# Altium PCB pcbChaves.PcbDoc
Units mm, origin at the board's own origin, x right, y up, seen from the top; angles counter-clockwise.
Board outline 86.57 x 75.6 mm, 2 copper layers (Top Layer, Bottom Layer); 43 components, 27 nets, 103 pads, 22 vias.
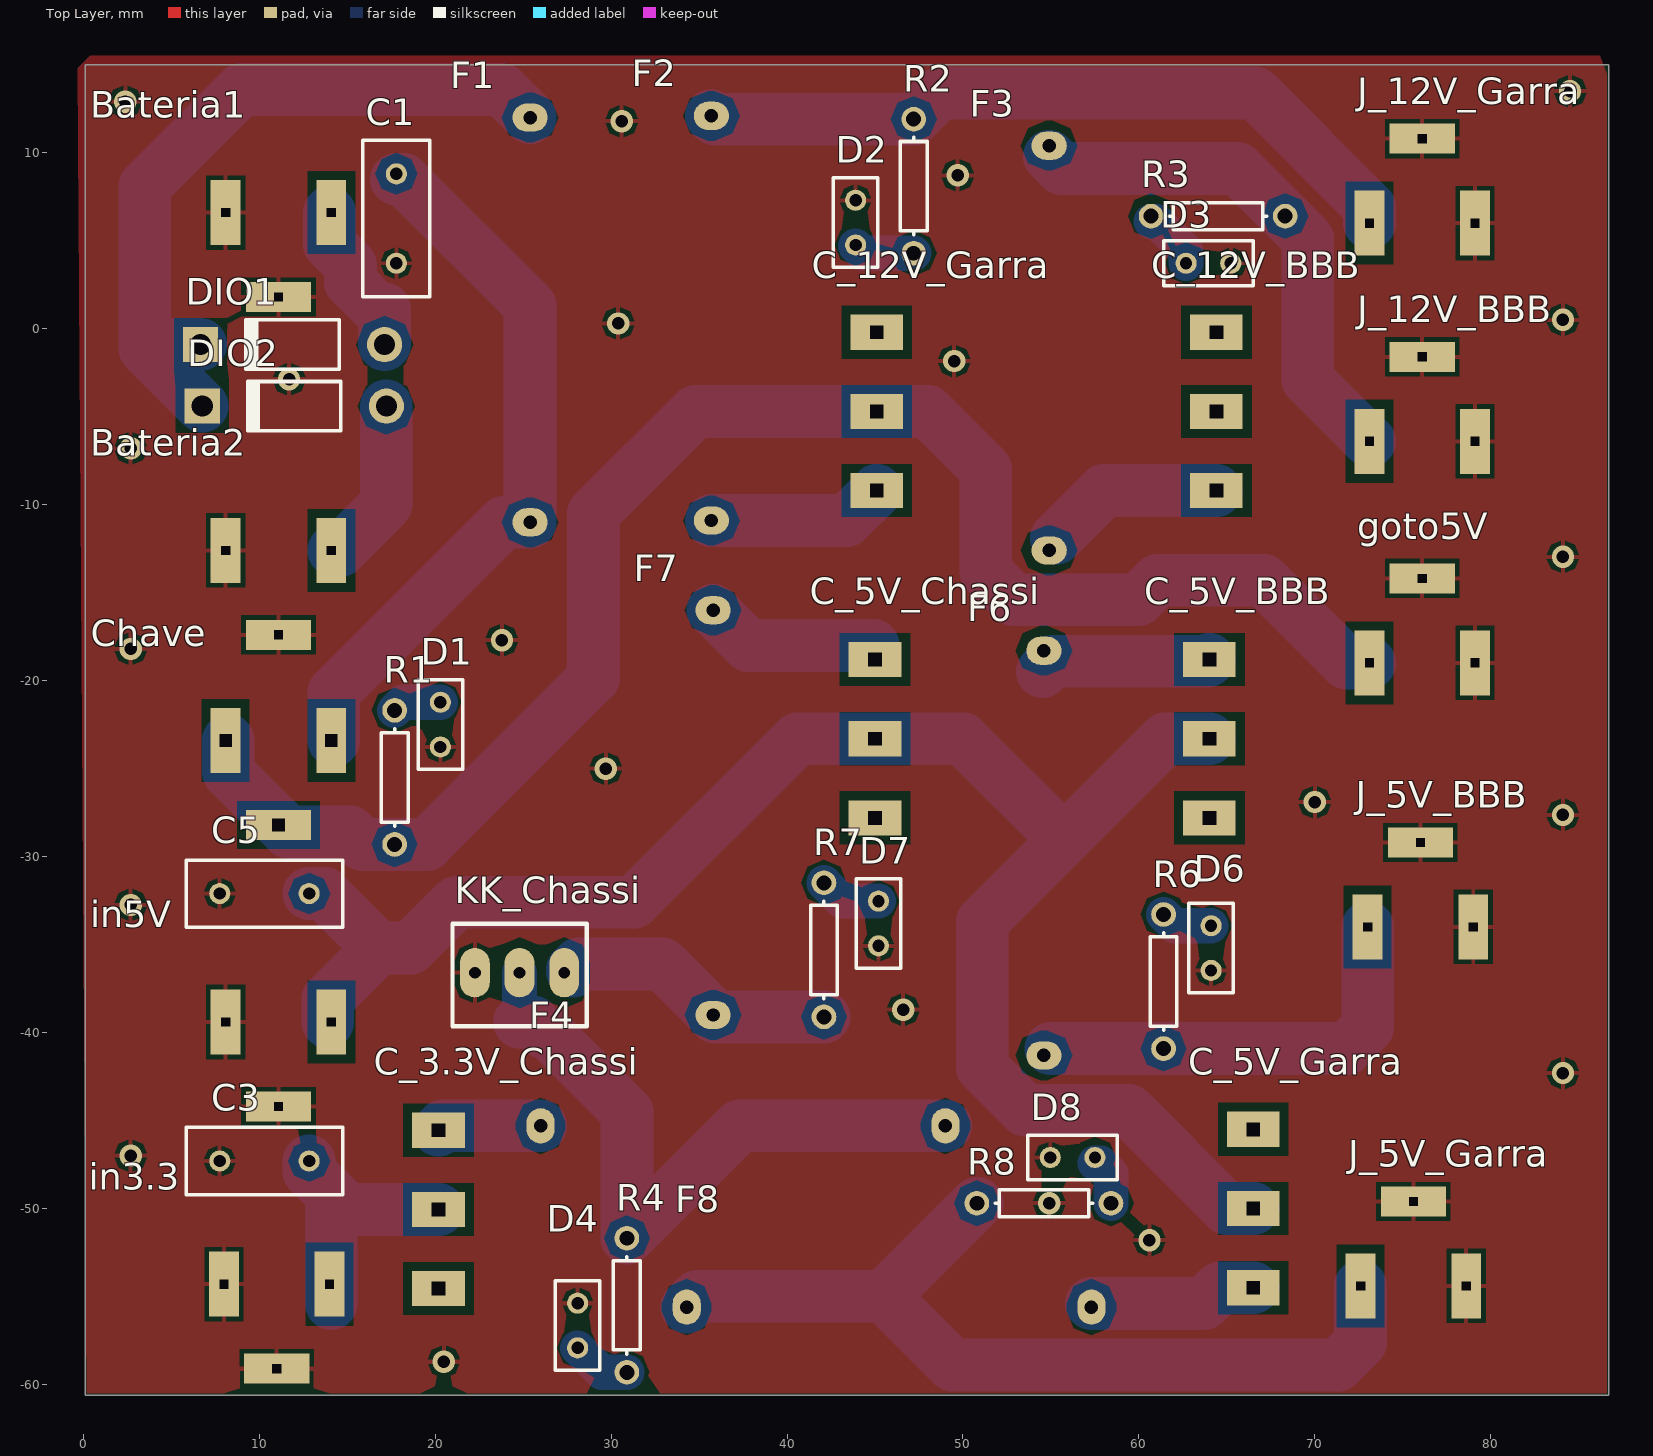
[diagram p0: Top Layer view]
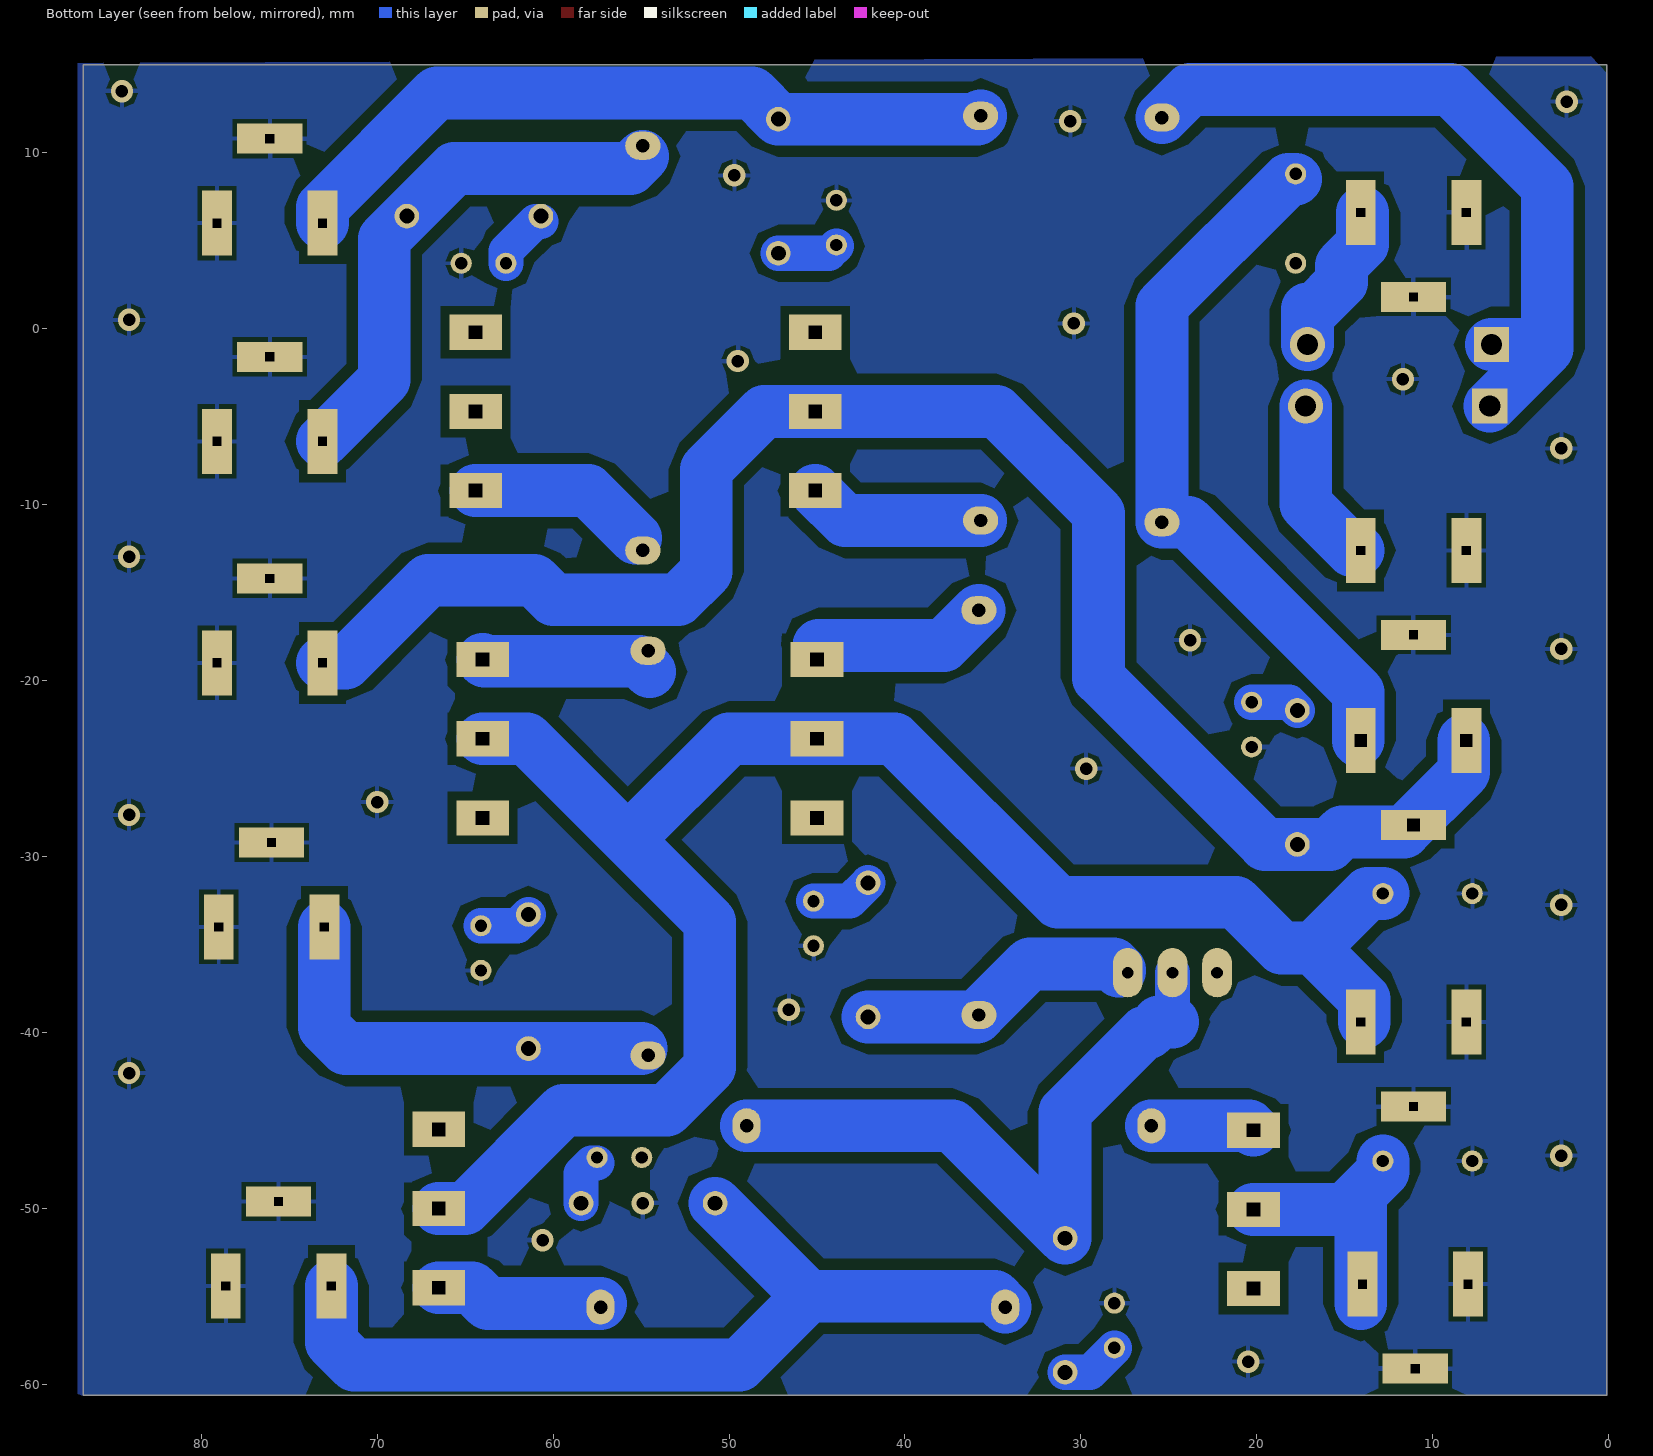
[diagram p1: Bottom Layer view, seen from below]
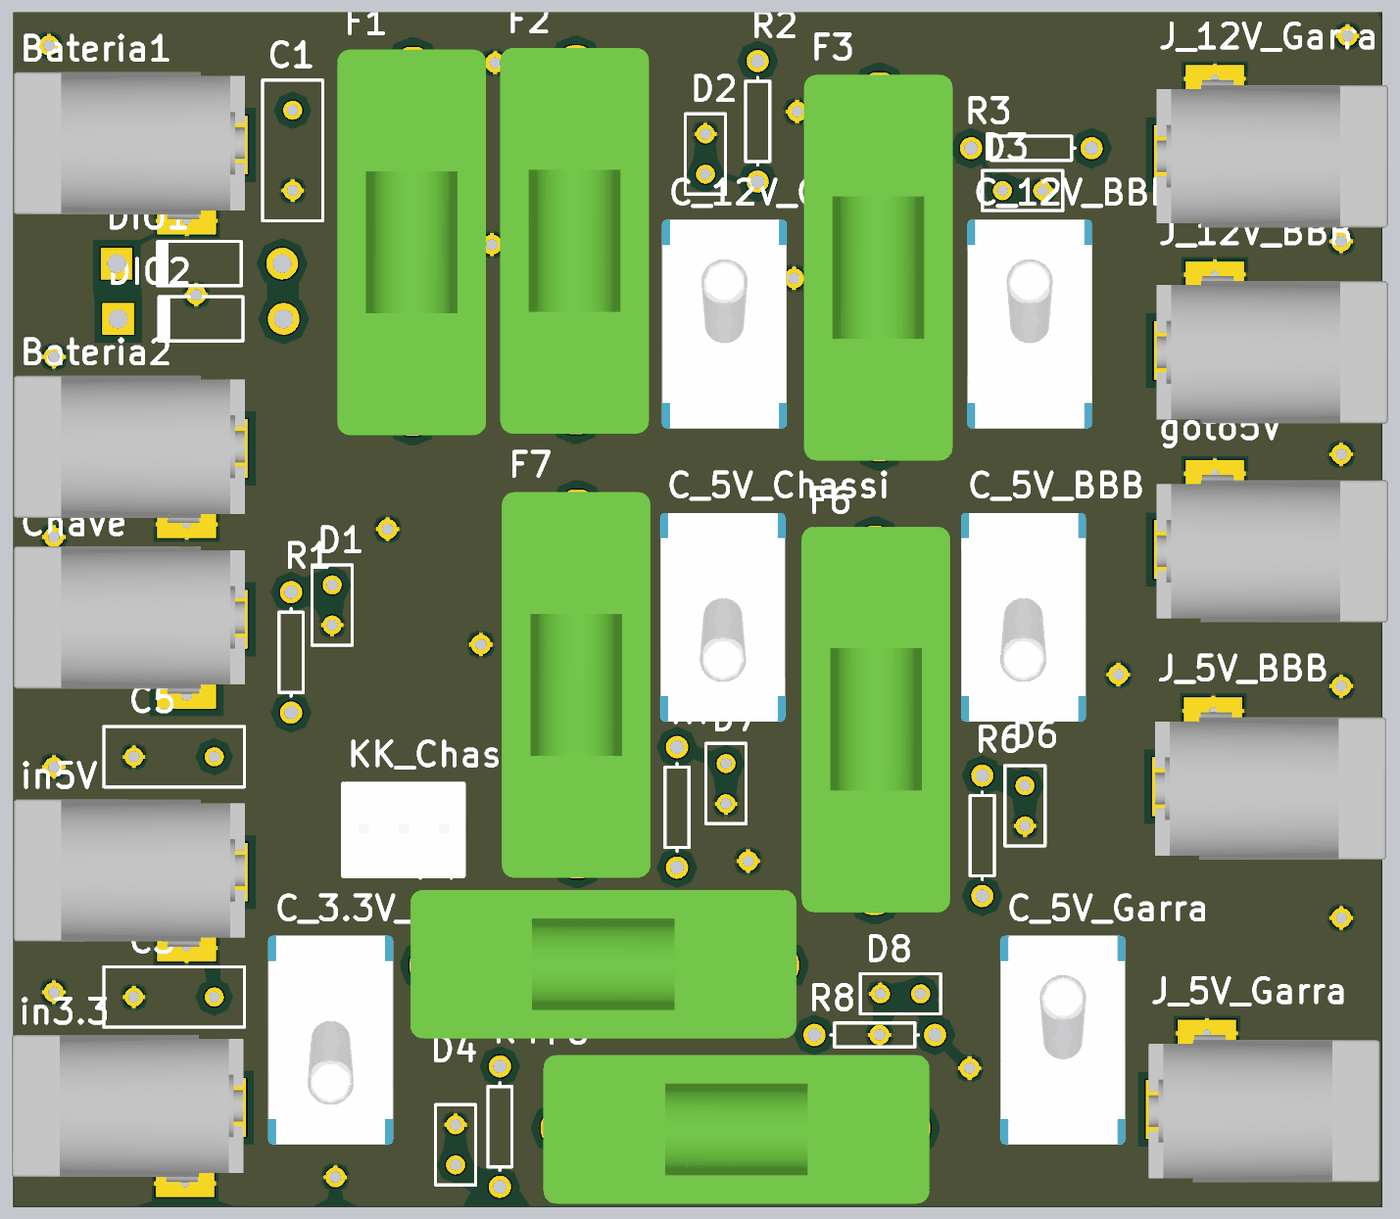
[diagram p2: 3D render of the assembled board from above, using the file's embedded part models]

## Layer stack, top to bottom
Top Solder: solder mask 0.0102, Solder Resist, Dk 3.5
Top Layer: signal copper 0.0356
Dielectric 1: dielectric 0.32, FR-4, Dk 4.8
Bottom Layer: signal copper 0.0356
Bottom Solder: solder mask 0.0102, Solder Resist, Dk 3.5

## Board outline
0.127,-60.6 86.7,-60.6 86.7,15 0.127,15

## Design rules (kind name [scope] priority, off if disabled: settings)
Clearance [All] p1: gap=0.5 ignorepadtopadclearanceinfootprint=FALSE
DiffPairsRouting [All] p1: maxlimit=1 minlimit=0.5 mostfreqgap=0.5 toplayer_minwidth=0.5 toplayer_maxwidth=4 toplayer_prefwidth=4 bottomlayer_minwidth=0.5 bottomlayer_maxwidth=4 bottomlayer_prefwidth=4 maxuncoupledlength=12.7
PlaneClearance [All] p1: clearance=0.7
PlaneConnect [All] p1: planeconnectstyle=Relief reliefexpansion=0.508 reliefentries=4 reliefconductorwidth=1 reliefairgap=0.254
PolygonConnect [All] p1: connectstyle=Relief reliefconductorwidth=0.254 reliefentries=4 polygonreliefangle="90 Angle" airgapwidth=0.254
RoutingVias [All] p1: holewidth=0.711 width=1.27 viastyle="Through Hole" minholewidth=0.711 minwidth=1.27 maxholewidth=0.711 maxwidth=1.27
SolderMaskExpansion [All] p1: expansion=0.102
Width [All] p1: maxlimit=4 minlimit=0.254 preferedwidth=3
27 further rules are at their usual default settings.

## Components (designator, comment, footprint, x,y, rotation, side; value= is the part's Value field where it differs from the comment)
Bateria1 "Jack" "JACK J4"#1 8.1,6.6 r0 top
Bateria2 "Jack" "JACK J4"#1 8.1,-12.6 r0 top
C1 "Cap2" RAD-0.2 17.8,6.26 r270 top value=100pF
C3 "Cap2" RAD-0.2 10.3,-47.3 r180 top value=100pF
C5 "Cap2" RAD-0.2 10.3,-32.1 r180 top value=100pF
C_3.3V_Chassi "Chave" Chave 20.2,-50.051 r90 top
C_5V_BBB "Chave" Chave 64,-23.3 r90 top
C_5V_Chassi "Chave" Chave 45,-23.3 r90 top
C_5V_Garra "Chave" Chave 66.5,-50 r270 top
C_12V_BBB "Chave" Chave 64.4,-4.7 r270 top
C_12V_Garra "Chave" Chave 45.1,-4.7 r270 top
Chave "Jack" "JACK J4"#2 8.1,-23.4 r0 top
D1 "LED2" RAD-0.1 20.3,-22.5 r270 top
D2 "LED2" RAD-0.1 43.9,6.03 r90 top
D3 "LED2" RAD-0.1 63.95,3.72 r0 top
D4 "LED2" RAD-0.1 28.1,-56.65 r90 top
D6 "LED2" RAD-0.1 64.1,-35.2 r270 top
D7 "LED2" RAD-0.1 45.2,-33.8 r270 top
D8 "LED2" RAD-0.1 56.23,-47.1 r180 top
DIO1 "Diode 1N4007" DO-41 11.9,-0.9 r180 top
DIO2 "Diode 1N4007" DO-41 12,-4.4 r180 top
F1 "Fuse 2" Fusivel 25.4,12 r270 top
F2 "Fuse 2" Fusivel 35.7,12.1 r270 top
F3 "Fuse 2" Fusivel 54.9,10.4 r270 top
F4 "Fuse 2" Fusivel 49,-45.3 r180 top
F6 "Fuse 2" Fusivel 54.6,-41.3 r90 top
F7 "Fuse 2" Fusivel 35.8,-16 r270 top
F8 "Fuse 2" Fusivel 34.3,-55.6 r0 top
goto5V "Jack" "JACK J4"#1 79.1,-18.99 r180 top
in3.3 "Jack" "JACK J4"#1 8,-54.3 r0 top
in5V "Jack" "JACK J4"#1 8.1,-39.4 r0 top
J_5V_BBB "Jack" "JACK J4"#1 79,-34 r180 top
J_5V_Garra "Jack" "JACK J4"#1 78.6,-54.4 r180 top
J_12V_BBB "Jack" "JACK J4"#1 79.1,-6.4 r180 top
J_12V_Garra "Jack" "JACK J4"#1 79.1,6 r180 top
KK_Chassi "KK3" 3-vias 24.8,-36.6 r270 top
R1 "Res1" AXIAL-0.3 17.7,-25.5 r270 top value=1K
R2 "Res1" AXIAL-0.3 47.2,8.1 r90 top value=1K
R3 "Res1" AXIAL-0.3 64.5,6.4 r0 top value=1K
R4 "Res1" AXIAL-0.3 30.9,-55.5 r90 top value=1K
R6 "Res1" AXIAL-0.3 61.4,-37.1 r270 top value=1K
R7 "Res1" AXIAL-0.3 42.1,-35.3 r270 top value=1K
R8 "Res1" AXIAL-0.3 54.6,-49.7 r180 top value=1K

## Footprints (in the part's own frame and the unit in brackets; to place one, negate y for a bottom-side part, rotate by r counter-clockwise, add the part's x,y. Pads: shape width x height; smd on the part's side, far side on the other; paste and mask are expansions set on the pad)
3-vias [mm]
  oval 2.8x1.7 hole 0.67 unplated: 1(0,2.54) 2(0,0) 3(0,-2.54)
  silkscreen extent -2.79,-3.81 3.05,3.81, body extent -2.84,-3.78 3,3.84, height 11.7
AXIAL-0.3 [mm] "Axial Device, Thru-Hole; 2 Leads; 0.3 in Pin Spacing"
  round 1.4 hole 0.85: 1(-3.81,0) 2(3.81,0)
  silkscreen extent -2.77,-0.76 2.77,0.76
Chave [mm]
  rect 2x3 hole 0.76 square: 1(0,0) 2(-4.5,0) 3(4.5,0)
  body extent -6.57,-3.95 6.63,3.95, height 28.86
DO-41 [mm] "Diode, Axial; Body 5.2 x 2.7 mm (LxDia. max), Lead Dia. 0.86 mm (max)"
  round 2 hole 1.2: 1(-5.23,0)
  rect 2x2 hole 1.2: 2(5.23,0)
  silkscreen extent -2.65,-1.4 2.75,1.4
Fusivel [mm]
  oval 1.6x2 hole 0.762: 1(0,0) 2(23,0)
  body extent -0.64,-4.78 23.76,4.62, height 13.41
"JACK J4"#1 [mm]
  rect 1.7x3.7 hole 0.5 square: 1(6,0) 2(0,0)
  rect 3.7x1.7 hole 0.5 square: 3(3,-4.8)
  body extent -7.94,-4.71 6.68,4.61, height 11
"JACK J4"#2 [mm]
  rect 1.7x3.7 hole 0.7 square: 1(6,0) 2(0,0)
  rect 3.7x1.7 hole 0.7 square: 3(3,-4.8)
  body extent -7.94,-4.71 6.68,4.61, height 11
RAD-0.1 [mm] "Radial Cap, Thru-Hole; 2 Leads; 0.1 in Pin Spacing"
  round 1.2 hole 0.7: 1(-1.27,0) 2(1.27,0)
  silkscreen extent -2.54,-1.27 2.54,1.27
RAD-0.2 [mm] "Radial Cap, Thru-Hole; 2 Leads; 0.2 in Pin Spacing"
  round 1.2 hole 0.7: 1(-2.54,0) 2(2.54,0)
  silkscreen extent -4.44,-1.91 4.44,1.91

## Part data
C1 C3 C5: "Capacitor", PackageDescription="Capacitor; 2 Leads", PackageReference=CAPR5-4X5, Published=23-Sep-2002, Publisher="Altium Limited"
D1 D2 D3 D4 D6 D7 D8: "Typical RED, GREEN, YELLOW, AMBER GaAs LED", LatestRevisionDate=17-Jul-2002, LatestRevisionNote="Re-released for DXP Platform.", PackageDescription="SM LED; 2 Flat Leads", PackageReference=3.2X1.6X1.1, PackageVersion=Feb-2002, Published=8-Jun-2000, Publisher="Altium Limited"
DIO1 DIO2: "1 Amp General Purpose Rectifier", Code_JEDEC=DO-204-AL, ComponentLink1Description="Manufacturer Link", ComponentLink1URL=http://www.fairchildsemi.com/, ComponentLink2Description=Datasheet, ComponentLink2URL=http://www.fairchildsemi.com/ds/1N%2F1N4001.pdf, DatasheetVersion=1998, LatestRevisionDate=17-Jul-2002, LatestRevisionNote="Re-released for DXP Platform.", PackageDescription="Diode, Axial; Body 5.2 x 2.7 mm (LxDia. max), Lead Dia. 0.86 mm (max)", PackageReference=DO-41, PackageVersion=Aug-1999, Published=8-Jun-2000, Publisher="Altium Limited"
F1 F2 F3 F4 F6 F7 F8: "Fuse", LatestRevisionDate=17-Jul-2002, LatestRevisionNote="Re-released for DXP Platform.", PackageDescription="Thru-Hole; 2 Leads", PackageReference=PIN-W2/E2.8, Published=8-Jun-2000, Publisher="Altium Limited"
KK_Chassi: library part KK3Vias
R1 R2 R3 R4 R6 R7 R8: "Resistor", LatestRevisionDate=17-Jul-2002, LatestRevisionNote="Re-released for DXP Platform.", PackageDescription="Axial Device, Thru-Hole; 2 Leads; 0.3 in Pin Spacing", PackageReference=AXIAL-0.3, Published=8-Jun-2000, Publisher="Altium Limited"

## Via types
v1: diameter 1.27, hole 0.711, Top Layer to Bottom Layer, 22 vias

## Nets (pads, with @x,y where several pads share a name; then routed paths per layer and width w, separated by ;. In a path a pad name is that pad's centre, name@x,y a point inside that pad or via, vN(x,y) a via of type N, cw(c..) or ccw(c..) an arc to the next point about the centre after c; other vN are vias at no path point)
3.3V: C3.1 C_3.3V_Chassi.1 in3.3.1 | length 15.1
  Bottom Layer w3: C3.1 12.84,-47.9 14.1,-49.16 ; in3.3.1@14.1,-55.4 14.1,-49.16 ; C_3.3V_Chassi.1 14.991,-50.051 14.1,-49.16
5V: C5.1 C_5V_BBB.1 C_5V_Chassi.1 C_5V_Garra.1 in5V.1 | length 101.1
  Bottom Layer w3: C5.1 13.7,-32.1 16.8,-35.2 ; in5V.1@13.9,-39.4 13.9,-38.1 16.8,-35.2 ; C_5V_BBB.1 61.5,-23.3 55.75,-29.05 ; C_5V_Garra.1 65,-50 59.41,-44.41 53.54,-44.41 51.1,-41.97 51.1,-33.7 55.75,-29.05 ; 16.8,-35.2 18.6,-35.2 21.2,-32.6 31.3,-32.6 40.6,-23.3 C_5V_Chassi.1 50,-23.3 55.75,-29.05
12V: C_12V_Garra.1 Chave.2 Chave.3 goto5V.1 R1.2 | length 94.3
  Bottom Layer w3: Chave.2@8.24,-23.4 8.24,-25.2 11.64,-28.6 15.15,-28.6 15.86,-29.31 R1.2 19.54,-29.31 29,-19.85 29,-10.5 34.8,-4.7 C_12V_Garra.1 48,-4.7 51.3,-8 51.3,-13.8 52.9,-15.4 59.972,-15.4 61.082,-14.29 67.09,-14.29 71.79,-18.99 goto5V.1
GND: Bateria1.2 Bateria1.3 Bateria2.2 Bateria2.3 C1.2 C3.2 C5.2 D1.2 D2.2 D3.2 D4.2 D6.2 D7.2 D8.2 goto5V.2 goto5V.3 in3.3.2 in3.3.3 in5V.2 in5V.3 J_5V_BBB.2 J_5V_BBB.3 J_5V_Garra.2 J_5V_Garra.3 J_12V_BBB.2 J_12V_BBB.3 J_12V_Garra.2 J_12V_Garra.3 KK_Chassi.3
  other v1: 20.5,-58.7 60.6,-51.8 54.9,-49.7 2.7,-47 84.1,-42.3 46.6,-38.7 2.7,-32.75 84.1,-27.633 70,-26.9 29.7,-25 2.7,-18.2 23.8,-17.7 84.1,-12.967 2.7,-6.8 11.7,-2.869 49.5,-1.835 30.4,0.3 84.1,0.5 49.7,8.719 30.6,11.8 2.4,12.9 84.5,13.5
NetBateria1_1: Bateria1.1 DIO1.1 | length 9
  Bottom Layer w3: Bateria1.1@14,6.6 14,4.8 15.2,3.6 15.2,2.643 16.723,1.12 17.13,1.12 DIO1.1
NetBateria2_1: Bateria2.1 DIO2.1 | length 9.6
  Bottom Layer w3: Bateria2.1@14.24,-12.6 14.6,-12.6 17.23,-9.97 DIO2.1
NetC1_1: C1.1 Chave.1 F1.2 | length 40.8
  Bottom Layer w3: Chave.1@14.24,-23.4 14.24,-20.66 23.9,-11 F1.2 25.4,1.3 18.2,8.5 C1.1@17.8,8.5
NetC_3.3V_Chassi_N.F: C_3.3V_Chassi.3 F4.2 | length 5.9
  Bottom Layer w3: C_3.3V_Chassi.3 20.451,-45.3 F4.2
NetC_5V_BBB_N.F: C_5V_BBB.3 F6.2 | length 9.8
  Bottom Layer w3: 54.5,-19.5 55.1,-18.9 63.9,-18.9 C_5V_BBB.3
NetC_5V_Chassi_N.F: C_5V_Chassi.3 F7.1 | length 9.9
  Bottom Layer w3: F7.1 37.8,-18 C_5V_Chassi.3@44.9,-18
NetC_5V_Garra_N.F: C_5V_Garra.3 F8.2 | length 9.6
  Bottom Layer w3: F8.2@57.3,-55.4 63.7,-55.4 64.6,-54.5 C_5V_Garra.3
NetC_12V_BBB_N.F: C_12V_BBB.3 F3.2 | length 10.2
  Bottom Layer w3: F3.2@55.3,-11.9 58,-9.2 C_12V_BBB.3
NetC_12V_Garra_N.F: C_12V_Garra.3 F2.2 | length 10.1
  Bottom Layer w3: F2.2 43.4,-10.9 C_12V_Garra.3
NetD1_1: D1.1 R1.1 | length 2.8
  Bottom Layer w2: R1.1 18.16,-21.23 D1.1
NetD2_1: D2.1 R2.1 | length 3.5
  Bottom Layer w2: D2.1@43.9,4.7 44.31,4.29 R2.1
NetD3_1: D3.1 R3.1 | length 3.4
  Bottom Layer w2: R3.1@60.69,6.1 60.99,6.1 62.68,4.41 D3.1
NetD4_1: D4.1 R4.1 | length 3.4
  Bottom Layer w2: D4.1 29.49,-59.31 R4.1
NetD6_1: D6.1 R6.1 | length 3
  Bottom Layer w2: R6.1 62.04,-33.93 D6.1
NetD7_1: D7.1 R7.1 | length 3.5
  Bottom Layer w2: R7.1 43.14,-32.53 D7.1
NetD8_1: D8.1 R8.1 | length 2.8
  Bottom Layer w2: D8.1@57.5,-47.41 57.81,-47.41 58.41,-48.01 R8.1
NetDIO1_2: DIO1.2 DIO2.2 F1.1 | length 42
  Bottom Layer w3: DIO1.2 3.73,-0.9 3.5,-1.13 ; DIO2.2 3.5,-1.13 ; F1.1 23.8,13.6 9,13.6 3.5,8.1 3.5,-1.13
NetF2_1: F2.1 J_12V_Garra.1 R2.2 | length 41.7
  Bottom Layer w3: F2.1 35.89,11.91 R2.2 48.69,13.4 66.6,13.4 73.1,6.9 J_12V_Garra.1
NetF3_1: F3.1 J_12V_BBB.1 R3.2 | length 29.6
  Bottom Layer w3: F3.1@54.9,9.8 55.6,9.1 65.61,9.1 R3.2 69.6,5.11 69.6,-2.9 J_12V_BBB.1
NetF4_1: F4.1 KK_Chassi.2 R4.2 | length 38.7
  Bottom Layer w2: 24.8,-39.4 KK_Chassi.2
  Bottom Layer w3: 24.8,-39.4 25.56,-39.4 26.159,-40 26.4,-40 30.9,-44.5 R4.2 ; R4.2@31.11,-51.5 37.31,-45.3 F4.1
NetF6_1: F6.1 J_5V_BBB.1 R6.2 | length 24.2
  Bottom Layer w3: F6.1@54.99,-40.91 R6.2 71.79,-40.91 73,-39.7 J_5V_BBB.1
NetF7_2: F7.2 KK_Chassi.1 R7.2 | length 15.8
  Bottom Layer w3: KK_Chassi.1@27.85,-36.5 27.8,-36.5 27.8,-36.45 28.15,-36.1 32.9,-36.1 F7.2 35.91,-39.11 R7.2
NetF8_1: F8.1 J_5V_Garra.1 R8.2 | length 51.4
  Bottom Layer w3: F8.1 34.91,-54.99 45.5,-54.99 ; R8.2 45.5,-54.99 ; J_5V_Garra.1 72.6,-57.6 71.3,-58.9 49.41,-58.9 45.5,-54.99
pads on no net: C_3.3V_Chassi.2 C_5V_BBB.2 C_5V_Chassi.2 C_5V_Garra.2 C_12V_BBB.1 C_12V_BBB.2 C_12V_Garra.2

## Polygon pours and split planes (outlines as drawn)
GND on Bottom Layer "GND_L01_P-001" (solid, pour order 24): -0.1,15.5 0.1,15.3 0.1,-60.6 86.8,-60.6 87,-60.8 87,15.1
GND on Bottom Layer "GND_L01_P-001" (solid, pour order 16): 0.1,-60.6
GND on Top Layer "GND_L01_P-001" (solid, pour order 26): -0.3,15.5 87,15.5 87.3,15.2 86.6,14.5 86.6,-60.5 0.2,-60.5